# Altium PCB STM32F103ZET6-double.PcbDoc
Units mm, origin at the board's own origin, x right, y up, seen from the top; angles counter-clockwise.
Board outline 36 x 36 mm, 2 copper layers (Top Layer, Bottom Layer), stack 1.571 mm thick; 12 components, 102 nets, 262 pads, 90 vias.
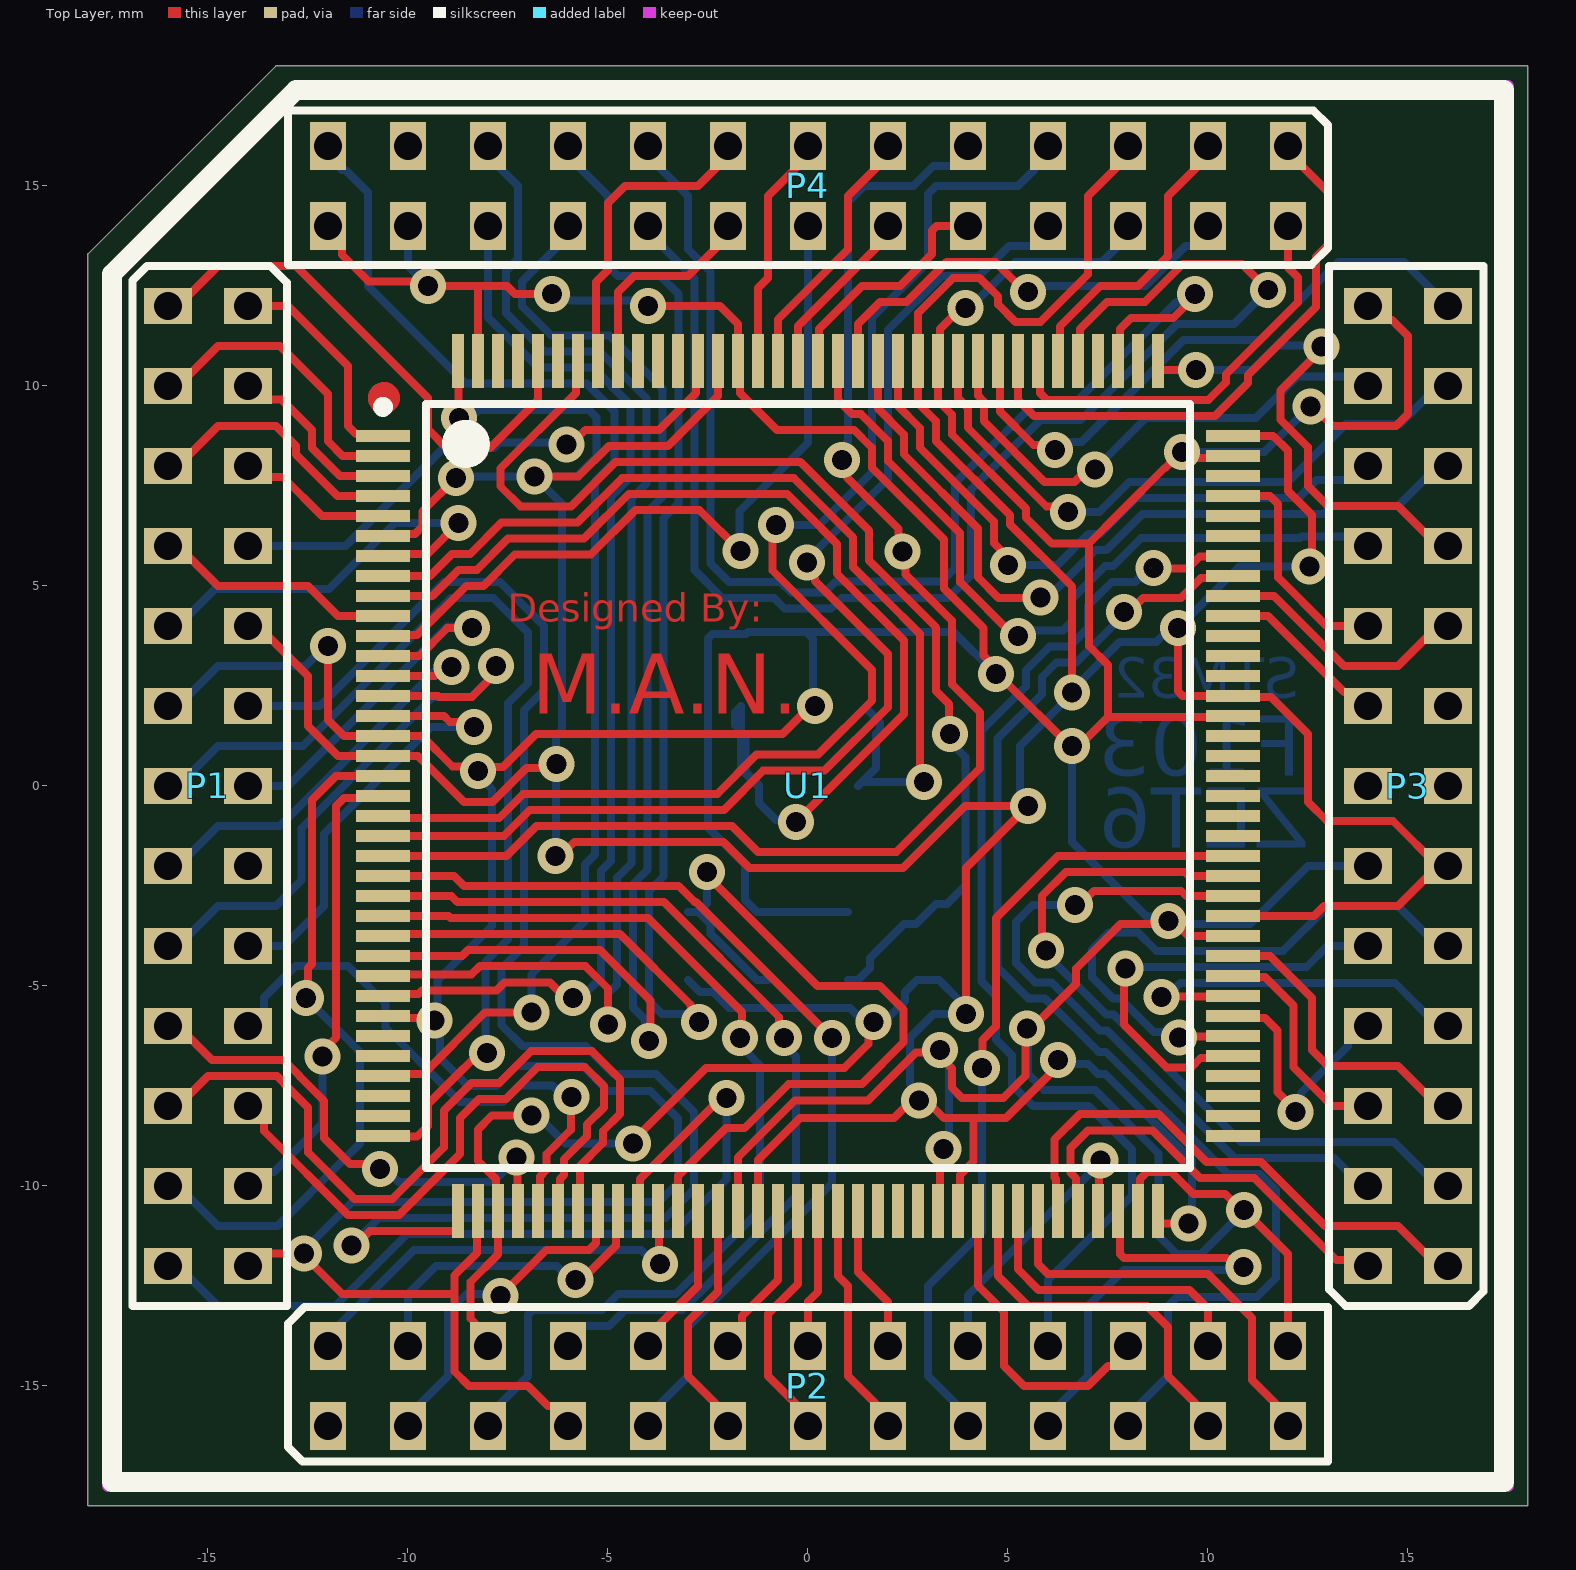
[diagram p0: Top Layer view]
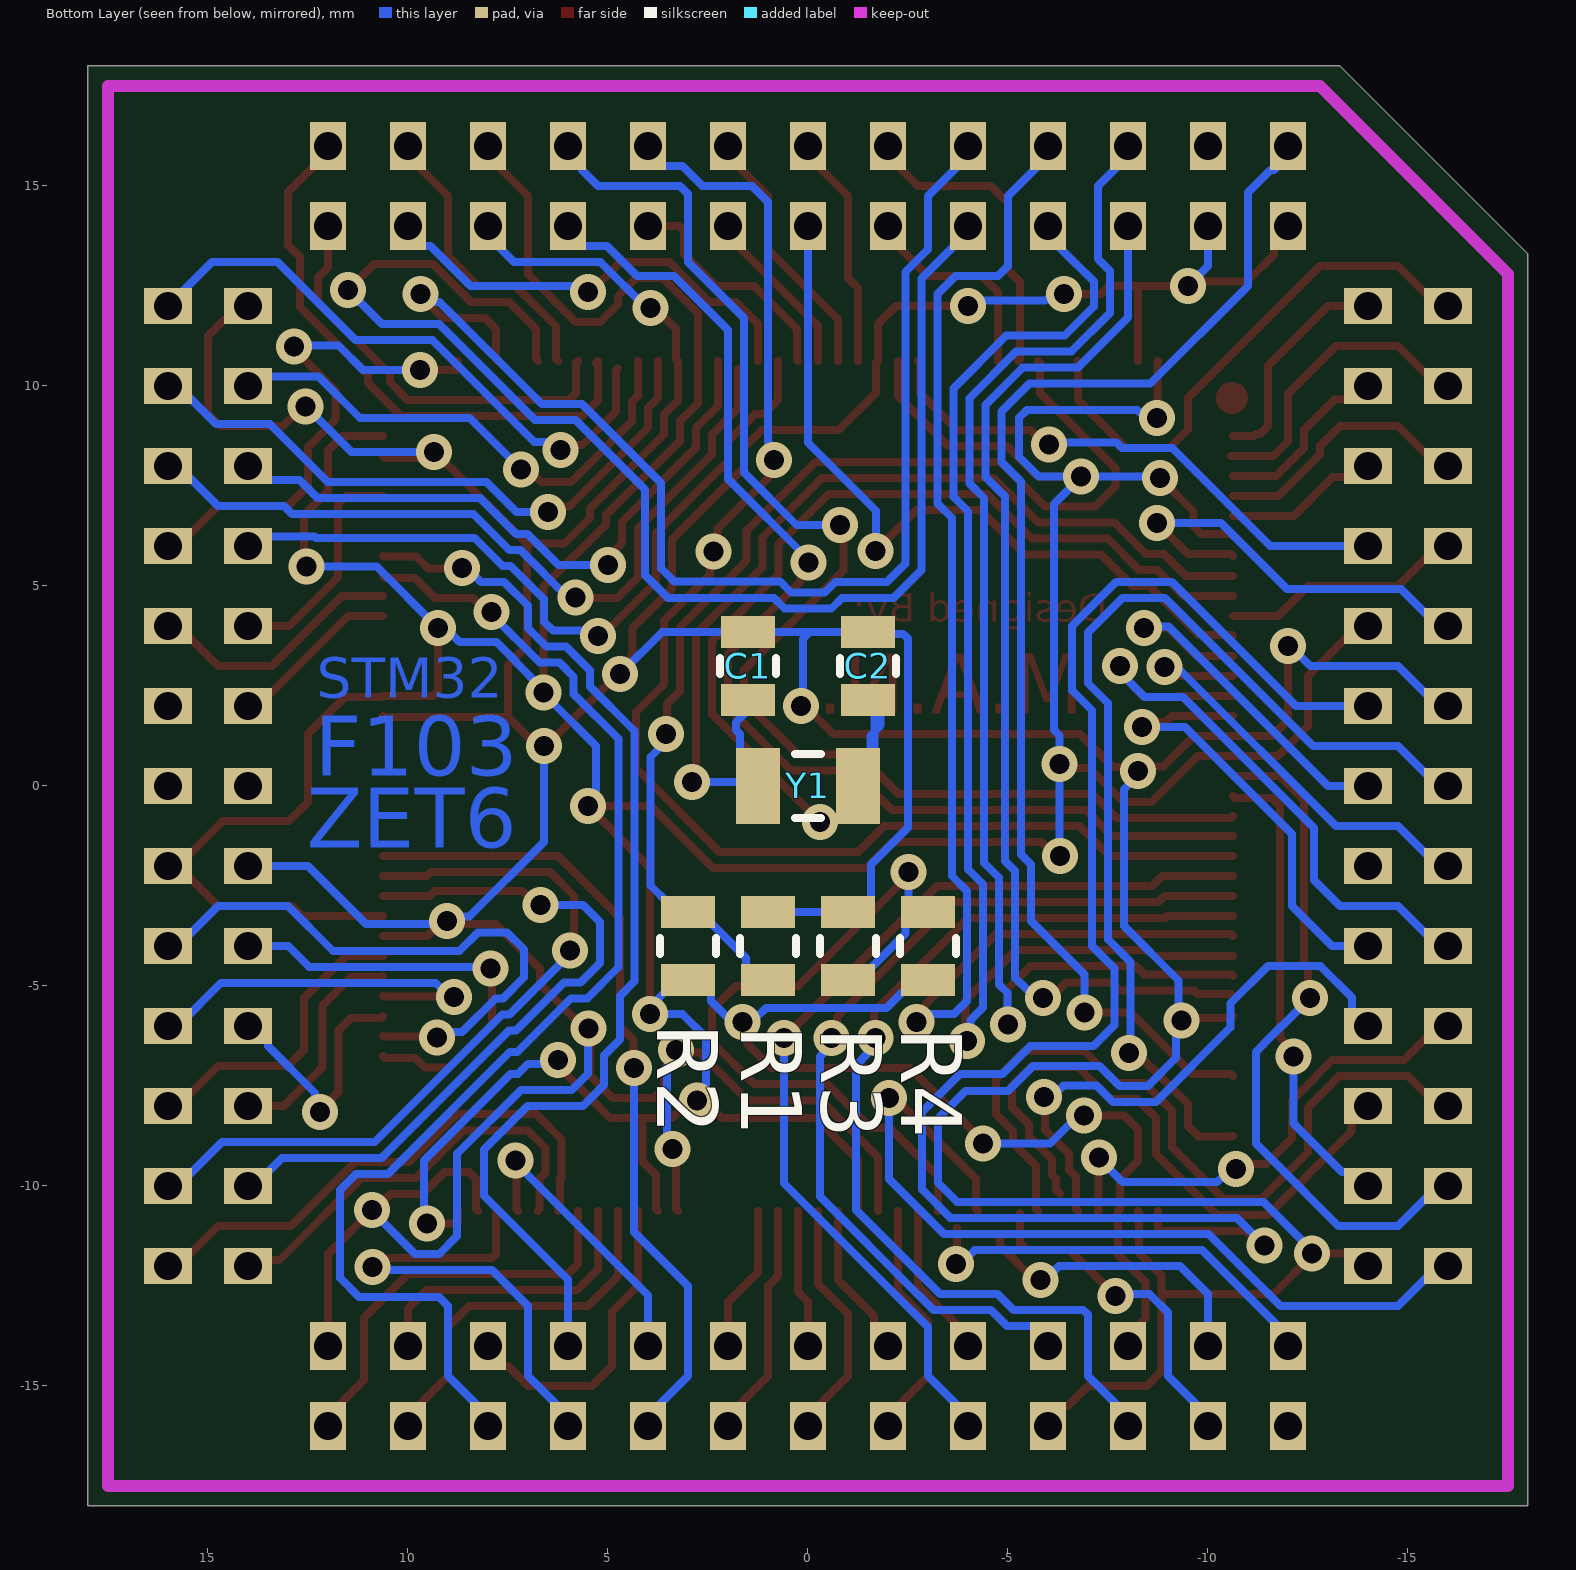
[diagram p1: Bottom Layer view, seen from below]
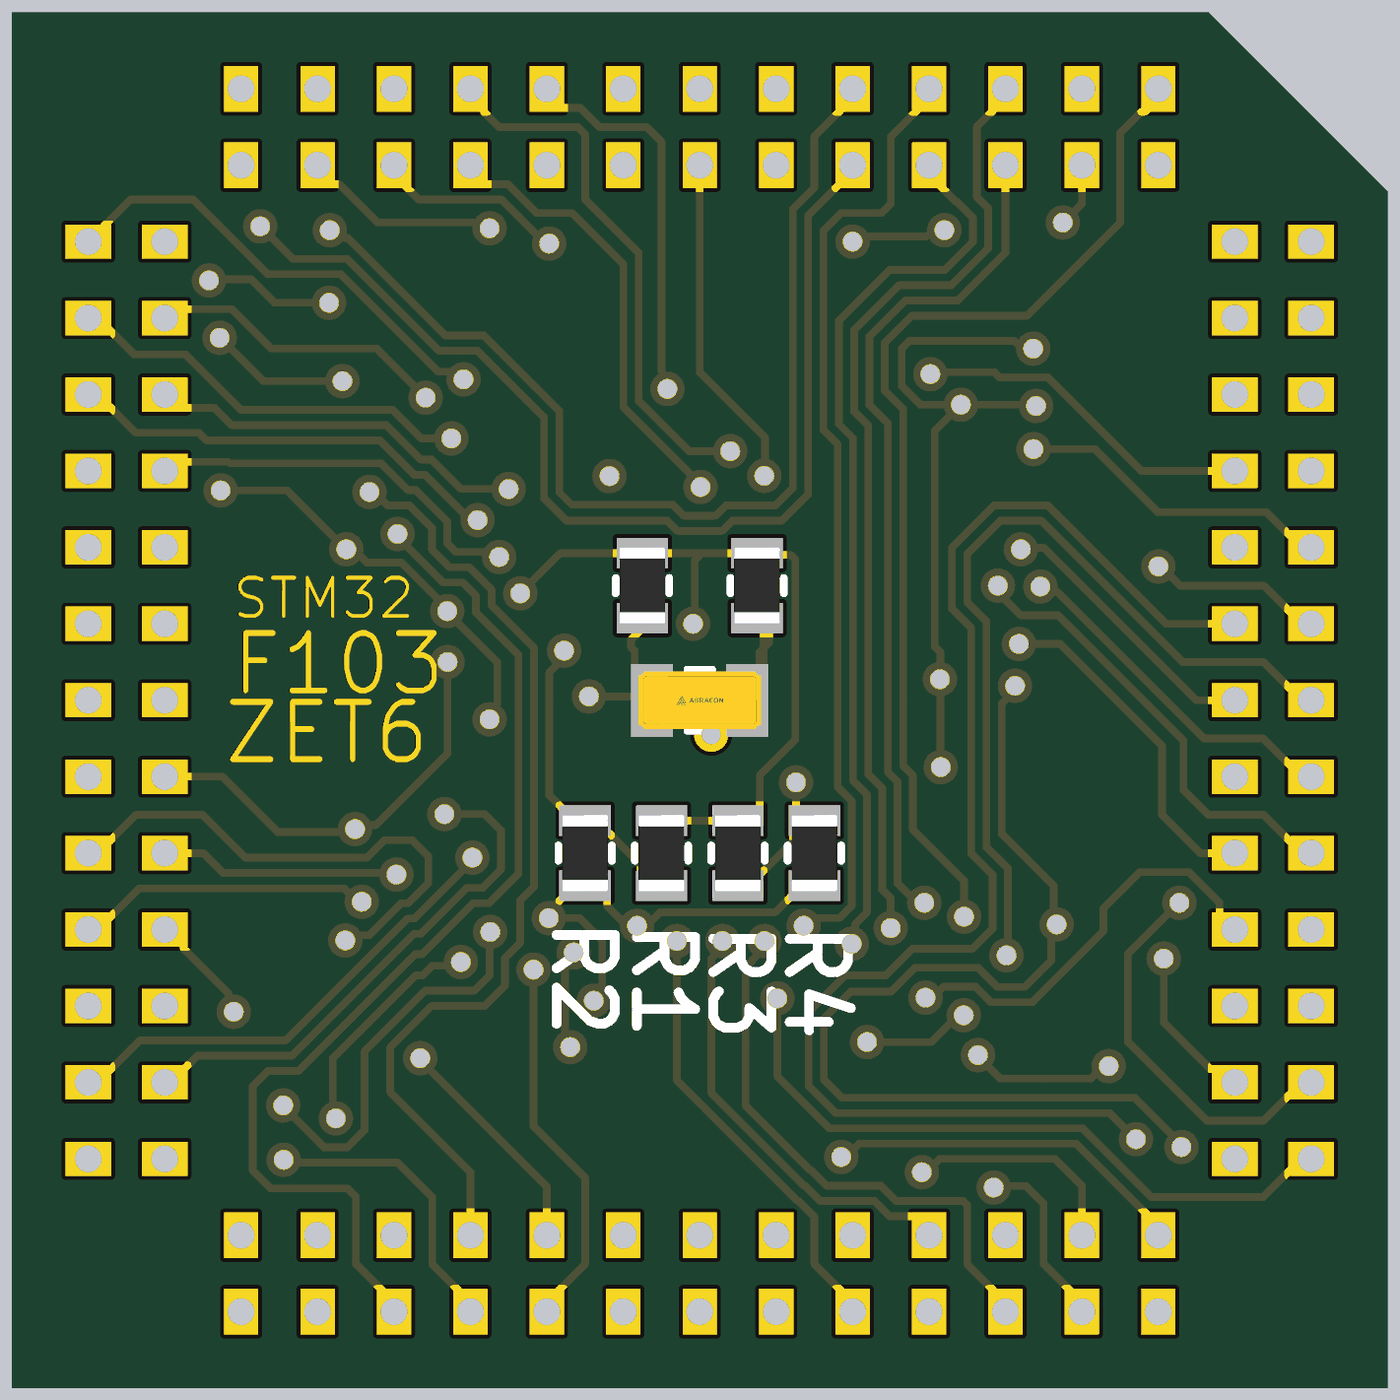
[diagram p2: 3D render of the assembled board from below, using the file's embedded part models]

## Layer stack, top to bottom
Top Solder: solder mask 0.0102, Solder Resist, Dk 3.5
Top Layer: signal copper 0.0356
Dielectric2: dielectric 1.5, FR-4, Dk 4.8
Bottom Layer: signal copper 0.0356
Bottom Solder: solder mask 0.0102, Solder Resist, Dk 3.5

## Board outline
-18,-18 18,-18 18,18 -13.3,18 -18,13.3

## Design rules (kind name [scope] priority, off if disabled: settings)
Clearance Clearance_1 [InNamedPolygon('Top Layer-No Net')] p1: gap=0.5 ignorepadtopadclearanceinfootprint=FALSE except(0: Arc-Hole Track-Hole SMDPad-Hole THPad-Hole Via-Hole Fill-Hole Poly-Hole Region-Hole Text-Hole)
Clearance [All] p2: gap=0.2 ignorepadtopadclearanceinfootprint=FALSE
ComponentClearance [All] p1 off: gap=0.254 collisioncheckmode=3 verticalgap=0.254 showdistances=FALSE
FabricationTestPointUsage TestPointUsage [All] p1: valid=0 allowmultiple=FALSE
FabricationTestpoint Testpoint [All] p1: side=3 testpointundercomponent=TRUE minsize=1.016 maxsize=2.54 preferedsize=1.524 minholesize=0 maxholesize=1.016 preferedholesize=0.813 testpointgrid=0.025 allowsidetop=TRUE allowsidebottom=TRUE usegrid=TRUE gridtolerance=0
Height [All] p1 off: minheight=0 maxheight=25.4 prefheight=12.7
HoleSize [All] p1 off: absolutevalues=TRUE maxlimit=2.54 minlimit=0.025 maxpercent=80.000 minpercent=20.000
HoleToHoleClearance [All] p1 off: gap=0.254 allowstackedmicrovias=TRUE
LayerPairs [All] p1 off: enforce=TRUE
MinimumSolderMaskSliver [All] p1 off: minsoldermaskwidth=0.254
NetAntennae [All] p1 off: netantennaetolerance=0
PolygonConnect PolygonConnect_1 [All vs IsNamedPolygon('Top Layer-No Net') Or IsNamedPolygon('Top Layer-No Net')] p1: thpad.connectstyle=Direct thpad.reliefconductorwidth=0.254 thpad.reliefentries=4 thpad.polygonreliefangle="90 Angle" thpad.airgapwidth=0.254 smdpad.connectstyle=Direct smdpad.reliefconductorwidth=0.254 smdpad.reliefentries=4 smdpad.polygonreliefangle="90 Angle" smdpad.airgapwidth=0.254 via.connectstyle=Relief via.reliefconductorwidth=0.254 via.reliefentries=4 via.polygonreliefangle="90 Angle" via.airgapwidth=0.254
PolygonConnect [All] p2: connectstyle=Relief reliefconductorwidth=0.254 reliefentries=4 polygonreliefangle="90 Angle" airgapwidth=0.254
RoutingVias [All] p1: holewidth=0.5 width=0.9 viastyle="Through Hole" minholewidth=0.5 minwidth=0.9 maxholewidth=0.5 maxwidth=0.9
SilkToSilkClearance [All] p1 off: silktosilkclearance=0.254
SilkToSolderMaskClearance [IsPad] p1 off: minsilkscreentomaskgap=0.254 clearancetoexposedcopper=TRUE
SolderMaskExpansion [All] p1: expansion=0.102 istentingtop=FALSE
Width [All] p1: maxlimit=1 minlimit=0.2 preferedwidth=0.2
19 further rules are at their usual default settings.

## Classes and differential pairs
component class STM32F103ZET6-double: C1 P1 P2 P3 P4 R1 R2 R3 R4 U1 Y1

## Components (designator, comment, footprint, x,y, rotation, side; value= is the part's Value field where it differs from the comment)
C1 "12.5pF" SMD_R0805 1.5,3 r270 bottom
C2 "12.5pF" SMD_R0805 -1.5,3 r270 bottom
P1 "MHDR2X13" HED-2mm-13X2 -16,12 r0 top
P2 "MHDR2X13" HED-2mm-13X2 -12,-16 r90 top locked
P3 "MHDR2X13" HED-2mm-13X2 16,-12 r180 top locked
P4 "MHDR2X13" HED-2mm-13X2 12,16 r270 top
R1 "10K" SMD_R0805 1,-4 r270 bottom
R2 "10K" SMD_R0805 3,-4 r270 bottom
R3 "10K" SMD_R0805 -1,-4 r270 bottom
R4 "10K" SMD_R0805 -3,-4 r270 bottom
U1 "STM32F103ZET6" STM-LQFP144_V 0,0 r0 top locked
Y1 "ABS07-32.768KHZ-T" FP-ABS07-MFG 0,0 r180 bottom

## Footprints (in the part's own frame and the unit in brackets; to place one, negate y for a bottom-side part, rotate by r counter-clockwise, add the part's x,y. Pads: shape width x height; smd on the part's side, far side on the other; paste and mask are expansions set on the pad)
FP-ABS07-MFG [mm]
  rect 1.1x1.9 smd paste+0 mask+0: 1(-1.25,0) 2(1.25,0)
  silkscreen extent -0.32,-0.8 0.33,0.8, body extent -1.6,-0.75 1.6,0.75, height 0.9
HED-2mm-13X2 [mm]
  rect 1.2x0.9 hole 0.7: 1(0,0) 2(2,0) 3(0,-2) 4(2,-2) 5(0,-4) 6(2,-4) 7(0,-6) 8(2,-6) 9(0,-8) 10(2,-8) 11(0,-10) 12(2,-10) 13(0,-12) 14(2,-12) 15(0,-14) 16(2,-14) 17(0,-16) 18(2,-16) 19(0,-18) 20(2,-18) 21(0,-20) 22(2,-20) 23(0,-22) 24(2,-22) 25(0,-24) 26(2,-24)
  silkscreen extent -0.89,-25 2.97,1
SMD_R0805 [mm] "Chip Resistor, 2-Leads, Body 2.0x1.3mm, IPC Medium Density"
  rect 0.8x1.35 smd: 1(-0.85,0) 2(0.85,0)
  silkscreen extent -0.2,-0.7 0.2,0.7, body extent -1,-0.6 1,0.6, height 0.45
STM-LQFP144_V [mm] "Thin QFP, 144-Leads, Body 20x20mm, Pitch 0.5mm, ST Recommended"
  rect 1.35x0.3 smd: 1(-10.625,8.75) 2(-10.625,8.25) 3(-10.625,7.75) 4(-10.625,7.25) 5(-10.625,6.75) 6(-10.625,6.25) 7(-10.625,5.75) 8(-10.625,5.25) 9(-10.625,4.75) 10(-10.625,4.25) 11(-10.625,3.75) 12(-10.625,3.25) 13(-10.625,2.75) 14(-10.625,2.25) 15(-10.625,1.75) 16(-10.625,1.25) 17(-10.625,0.75) 18(-10.625,0.25) 19(-10.625,-0.25) 20(-10.625,-0.75) 21(-10.625,-1.25) 22(-10.625,-1.75) 23(-10.625,-2.25) 24(-10.625,-2.75) 25(-10.625,-3.25) 26(-10.625,-3.75) 27(-10.625,-4.25) 28(-10.625,-4.75) 29(-10.625,-5.25) 30(-10.625,-5.75) 31(-10.625,-6.25) 32(-10.625,-6.75) 33(-10.625,-7.25) 34(-10.625,-7.75) 35(-10.625,-8.25) 36(-10.625,-8.75) 73(10.625,-8.75) 74(10.625,-8.25) 75(10.625,-7.75) 76(10.625,-7.25) 77(10.625,-6.75) 78(10.625,-6.25) 79(10.625,-5.75) 80(10.625,-5.25) 81(10.625,-4.75) 82(10.625,-4.25) 83(10.625,-3.75) 84(10.625,-3.25) 85(10.625,-2.75) 86(10.625,-2.25) 87(10.625,-1.75) 88(10.625,-1.25) 89(10.625,-0.75) 90(10.625,-0.25) 91(10.625,0.25) 92(10.625,0.75) 93(10.625,1.25) 94(10.625,1.75) 95(10.625,2.25) 96(10.625,2.75) 97(10.625,3.25) 98(10.625,3.75) 99(10.625,4.25) 100(10.625,4.75) 101(10.625,5.25) 102(10.625,5.75) 103(10.625,6.25) 104(10.625,6.75) 105(10.625,7.25) 106(10.625,7.75) 107(10.625,8.25) 108(10.625,8.75)
  rect 0.3x1.35 smd: 37(-8.75,-10.625) 38(-8.25,-10.625) 39(-7.75,-10.625) 40(-7.25,-10.625) 41(-6.75,-10.625) 42(-6.25,-10.625) 43(-5.75,-10.625) 44(-5.25,-10.625) 45(-4.75,-10.625) 46(-4.25,-10.625) 47(-3.75,-10.625) 48(-3.25,-10.625) 49(-2.75,-10.625) 50(-2.25,-10.625) 51(-1.75,-10.625) 52(-1.25,-10.625) 53(-0.75,-10.625) 54(-0.25,-10.625) 55(0.25,-10.625) 56(0.75,-10.625) 57(1.25,-10.625) 58(1.75,-10.625) 59(2.25,-10.625) 60(2.75,-10.625) 61(3.25,-10.625) 62(3.75,-10.625) 63(4.25,-10.625) 64(4.75,-10.625) 65(5.25,-10.625) 66(5.75,-10.625) 67(6.25,-10.625) 68(6.75,-10.625) 69(7.25,-10.625) 70(7.75,-10.625) 71(8.25,-10.625) 72(8.75,-10.625) 109(8.75,10.625) 110(8.25,10.625) 111(7.75,10.625) 112(7.25,10.625) 113(6.75,10.625) 114(6.25,10.625) 115(5.75,10.625) 116(5.25,10.625) 117(4.75,10.625) 118(4.25,10.625) 119(3.75,10.625) 120(3.25,10.625) 121(2.75,10.625) 122(2.25,10.625) 123(1.75,10.625) 124(1.25,10.625) 125(0.75,10.625) 126(0.25,10.625) 127(-0.25,10.625) 128(-0.75,10.625) 129(-1.25,10.625) 130(-1.75,10.625) 131(-2.25,10.625) 132(-2.75,10.625) 133(-3.25,10.625) 134(-3.75,10.625) 135(-4.25,10.625) 136(-4.75,10.625) 137(-5.25,10.625) 138(-5.75,10.625) 139(-6.25,10.625) 140(-6.75,10.625) 141(-7.25,10.625) 142(-7.75,10.625) 143(-8.25,10.625) 144(-8.75,10.625)
  silkscreen extent -10.75,-9.55 9.55,9.6, body extent -10,-10 10,10, height 1.6

## Part data
C1 C2: library part Cap, "Capacitor", LatestRevisionDate=17-Jul-2002, LatestRevisionNote="Re-released for DXP Platform.", PackageReference=RAD-0.3, Published=8-Jun-2000, Publisher="Altium Limited"
P1 P2 P3 P4: "Header, 13-Pin, Dual row", LatestRevisionDate=17-Jul-2002, LatestRevisionNote="Re-released for DXP Platform.", Publisher="Altium Limited"
R1 R2 R3 R4: library part Res1, "Resistor", LatestRevisionDate=17-Jul-2002, LatestRevisionNote="Re-released for DXP Platform.", PackageReference=AXIAL-0.3, Published=8-Jun-2000, Publisher="Altium Limited"
U1: library part CMP-0237-00176-3, "ARM Cortex-M3 32-bit MCU, 512 KB Flash, 64 KB Internal RAM, 112 I/Os, 144-pin LQFP, -40 to 85 degC, Tray", I/Os (High Current)=112, Operating Frequency(F) (Processor speed) (MHz)=72, Supply Voltage(Vcc) min (V)=2, A/D Converter="3x12-bit (21 Channel)", ComponentLink1Description="Manufacturer URL", ComponentLink1URL=http://www.st.com/web/en/home.html, ComponentLink2Description=Datasheet, ComponentLink2URL=http://www.st.com/st-web-ui/static/active/en/resource/technical/document/datasheet/CD00191185.pdf, ComponentLink3Description="Package Specification", ComponentLink3URL=http://www.st.com/st-web-ui/static/active/en/resource/technical/document/datasheet/DM00037051.pdf, Core="ARM Cortex-M3", D/A Converter="2x12-bit (2 Channel)", DatasheetVersion="Rev. 8", FLASH Size (Prog) (kB)=512, Internal RAM Size (kB)=64, Mounting Technology="Surface Mount", PackageDescription="144-Pin Low Profile Quad Flat Package, 20 x 20 mm Body, 0.5 mm Pitch", PackageReference=LQFP144, PackageVersion="Rev. 4, 06/2013", Packing=Tray, PartNumber=STM32F103ZET6
Y1: library part CMP-0447-00001-4, "Crystal 32.768kHz ±20ppm (Tol) 12.5pF FUND 70kΩ 2-Pin CSMD T/R", Case/Package=CSMD, ESR (Equivalent Series Resistance)=70kR, Frequency=32.768kHz, Frequency Tolerance=20ppm, Load Capacitance=12.5pF, Max Operating Temperature=85°C, Min Operating Temperature=-40°C, Operating Frequency="32.768 kHz", Package Quantity=3000, Depth=1.5mm, Height=0.9mm, Lead Free="Lead Free", Length=3.2mm, Number of Pins=2, Packaging="Tape and Reel", Radiation Hardening=No, REACH SVHC="No SVHC", RoHS Compliant=Yes, Series=ABS07, Series Resistance=70kR, Termination=SMD/SMT, Tolerance=20ppm, Width=1.5mm

## Via types
v1: diameter 0.9, hole 0.5, Top Layer to Bottom Layer, tented both sides, 89 vias
v2: diameter 0.9, hole 0.5, Top Layer to Bottom Layer, 1 vias

## Nets (pads, with @x,y where several pads share a name; then routed paths per layer and width w, separated by ;. In a path a pad name is that pad's centre, name@x,y a point inside that pad or via, vN(x,y) a via of type N, cw(c..) or ccw(c..) an arc to the next point about the centre after c; other vN are vias at no path point)
7SEG-CLK: P4.18 U1.113 | length 34.8
  Top Layer w0.2: U1.113 6.8,10.675 6.8,11.424 7.476,12.1 8.421,12.1 9.371,13.05 10.85,13.05 v1(11.5,12.4)
  Bottom Layer w0.2: P4.18 -4,13.85 -2.838,12.688 -2.838,5.396 -2.142,4.7 -0.851,4.7 -0.581,4.43 0.581,4.43 0.851,4.7 3.5,4.7 4.075,5.275 4.075,7.409 5.812,9.146 6.82,9.146 9.224,11.55 10.65,11.55 v1(11.5,12.4)
7SEG-LCH: P1.4 U1.3 | length 4.6
  Top Layer w0.2: P1.4 -13.663,9.663 -13.163,9.663 -12.4,8.9 -12.4,8.451 -11.699,7.75 U1.3
7SEG-RST: P4.17 U1.111 | length 30.9
  Top Layer w0.2: U1.111 7.8,10.675 7.8,11.424 8.076,11.7 9.131,11.7 9.681,12.25 v1(9.681,12.3)
  Bottom Layer w0.2: P4.17 -4,15.75 -3,14.75 -3,13.416 -2.438,12.854 -2.438,5.562 -1.976,5.1 -0.685,5.1 -0.415,4.83 0.415,4.83 0.7,5.115 3.349,5.115 3.675,5.441 3.675,7.575 5.646,9.546 6.654,9.546 9.058,11.95 9.066,11.95 9.216,12.1 9.292,12.1 9.492,12.3 v1(9.681,12.3)
7SEG-SDI: P1.3 U1.2 | length 7.7
  Top Layer w0.2: P1.3 -15.75,10 -14.75,11 -13.2,11 -12,9.8 -12,8.617 -11.633,8.25 U1.2 U1.2@-10.575,8.25
7SEG-SHF: P1.2 U1.1 | length 5.6
  Top Layer w0.2: P1.2 -13,12 -11.5,10.5 -11.5,9 -11.3,8.8 -11.2,8.8 -11.15,8.75 U1.1
ADC_LEVEL: P4.7 U1.20 | length 33
  Top Layer w0.2: U1.20 -10.575,-0.8 -7.718,-0.8 -7.118,-0.2 -2.266,-0.2 -1.283,0.783 0.251,0.783 1.6,2.131 1.6,2.9 -0.891,5.391 -0.891,6.424 v1(-0.797,6.518)
  Bottom Layer w0.2: v1(-0.797,6.518) 0.278,6.518 1.596,7.835 1.596,11.696 3,13.1 3,14.8 3.2,15 5.25,15 5.65,15.4 5.65,15.65 P4.7
ADC_MIC: P4.9 U1.22 | length 35.7
  Top Layer w0.2: U1.22 -7.537,-1.75 -6.787,-1 -1.9,-1 -1.25,-1.65 2.211,-1.65 4.3,0.439 4.3,1.839 3.6,2.539 3.6,4.132 2.444,5.287 2.444,5.782 2.264,5.963 2.264,6.428 0.98,7.712 0.98,8.012 v1(0.846,8.146)
  Bottom Layer w0.2: v1(0.846,8.146) 0.98,8.28 0.98,8.593 1,8.613 1,14.6 1.4,15 2.634,15 3.134,15.5 3.65,15.5 4,15.85 P4.9
  other v1: 2.362,5.865
BOOT0: R1.2 R2.1 U1.138 | length 28.5
  Top Layer w0.2: U1.138 -5.8,10.575 -5.8,9.826 -7.69,7.936 -7.69,7.492 -7.181,6.983 -5.926,6.983 -4.809,8.1 -0.188,8.1 1.53,6.382 1.53,5.636 2.051,5.115 3.2,3.966 3.2,2.374 3.526,2.048 3.526,1.321 v1(3.549,1.298)
  Bottom Layer w0.2: R1.2 1.25,-4.85 1.55,-4.55 1.55,-4.3 2.4,-3.45 2.7,-3.45 3.2,-2.95 3.475,-2.95 3.94,-2.485 3.94,0.717 3.549,1.108 v1(3.549,1.298)
BOOT1: R3.2 R4.1 U1.48 | length 19
  Top Layer w0.2: U1.48 -3.25,-9.75 -2.05,-8.55 -1.581,-8.55 -0.481,-7.45 1.35,-7.45 2.393,-6.407 2.393,-5.593 1.8,-5 0.241,-5 -2.52,-2.239 v1(-2.52,-2.15)
  Bottom Layer w0.2: R4.1 R4.1@-2.725,-3.15 ; R4.1@-2.738,-3.15 -2.438,-3.45 -2.438,-3.687 -1.275,-4.85 R3.2 ; R4.1@-2.713,-3.138 -2.52,-2.945 v1(-2.52,-2.15)
CLCD-EN: P3.20 U1.125 | length 19.1
  Top Layer w0.2: U1.125 0.75,9.65 1.104,9.296 1.322,9.296 1.996,8.622 1.996,8.127 3.8,6.323 3.8,5.102 5.154,3.748 v1(5.248,3.748)
  Bottom Layer w0.2: v1(5.248,3.748) 5.382,3.882 6.375,3.882 6.604,4.112 6.604,4.672 7.431,5.5 7.631,5.5 8.331,6.2 12.297,6.2 12.337,6.24 13.76,6.24 P3.20
DATA0: P4.3 U1.114 | length 7.5
  Top Layer w0.2: U1.114 6.3,10.675 6.3,11.49 7.31,12.5 8.255,12.5 9,13.245 9,14.75 10,15.75 P4.3
DATA1: P4.2 U1.115 | length 10.5
  Top Layer w0.2: U1.115 5.8,10.575 5.8,9.826 5.976,9.65 9.811,9.65 10.011,9.65 10.45,10.089 10.45,10.289 12.25,12.089 12.25,12.711 12,12.961 P4.2
DATA2: P4.1 U1.116 | length 14.5
  Top Layer w0.2: U1.116@5.3,10.575 U1.116 5.25,9.65 5.65,9.25 10,9.25 10.176,9.25 11,10.074 11,10.274 12.7,11.974 12.7,13.226 13,13.526 13,14.85 12,15.85 P4.1
DATA3: P3.25 U1.117 | length 15.1
  Top Layer w0.2: U1.117@4.755,10.43 4.8,10.385 4.8,9.363 5.644,8.519 6.059,8.519 v1(6.182,8.396)
  Bottom Layer w0.2: v1(6.182,8.396) 6.372,8.396 6.576,8.6 6.839,8.6 9.389,11.15 11.311,11.15 13.261,13.1 14.9,13.1 P3.25
DATA4: P3.24 U1.118 | length 13
  Top Layer w0.2: U1.118 4.25,9.762 4.396,9.616 4.396,9.121 5.917,7.6 6.666,7.6 6.983,7.917 v1(7.172,7.917)
  Bottom Layer w0.2: v1(7.172,7.917) 8.46,9.204 11.204,9.204 12.234,10.234 13.766,10.234 P3.24
DATA5: P3.23 U1.119 | length 16
  Top Layer w0.2: U1.119 3.75,9.697 3.996,9.451 3.996,8.956 5.971,6.981 6.369,6.981 v1(6.5,6.85)
  Bottom Layer w0.2: v1(6.5,6.85) 7.284,6.85 8.034,7.6 12.004,7.6 13.454,9.05 14.8,9.05 15.75,10 P3.23
DATA6: P3.22 U1.122 | length 16.3
  Top Layer w0.2: U1.122 2.25,9.5 2.796,8.954 2.796,8.459 4.65,6.605 4.65,6.068 5.002,5.716 v1(5.002,5.527)
  Bottom Layer w0.2: v1(5.002,5.527) 6.237,5.527 7.01,6.3 7.3,6.3 8.2,7.2 12.262,7.2 12.712,7.65 13.65,7.65 P3.22
DATA7: P3.21 U1.123 | length 19.6
  Top Layer w0.2: U1.123@1.75,10.425 1.75,9.434 2.396,8.788 2.396,8.293 4.25,6.439 4.25,5.218 4.768,4.7 5.8,4.7 v1(5.813,4.713)
  Bottom Layer w0.2: v1(5.813,4.713) 6.002,4.713 7.189,5.9 7.465,5.9 8.366,6.8 12.9,6.8 13.1,7 14.75,7 P3.21@15.75,8 ; P3.21@15.77,8 P3.21
DATA8: P2.10 U1.49 | length 3.9
  Top Layer w0.2: P2.10 -4,-13.75 -2.75,-12.5 U1.49
DATA9: P2.11 U1.50 | length 6.1
  Top Layer w0.2: U1.50 -2.25,-12.643 -3,-13.393 -3,-14.75 -2,-15.75 P2.11
DATA10: P2.12 U1.53 | length 3.9
  Top Layer w0.2: P2.12 -1.65,-13.65 -1.65,-13.25 -0.75,-12.35 U1.53
DATA11: P2.13 U1.54 | length 6.1
  Top Layer w0.2: U1.54 -0.25,-12.45 -1,-13.2 -1,-14.75 0,-15.75 P2.13
DATA12: P2.14 U1.55 | length 3.5
  Top Layer w0.2: P2.14 0,-12.894 0.25,-12.644 U1.55
DATA13: P2.15 U1.56 | length 5.9
  Top Layer w0.2: U1.56 0.75,-12.25 1,-12.5 1,-14.75 2,-15.75 P2.15
DATA14: P2.16 U1.57 | length 3.7
  Top Layer w0.2: U1.57 1.25,-12.15 2,-12.9 P2.16
DATA15: P2.17 U1.87 | length 20.4
  Top Layer w0.2: v1(4.35,-7.05) 4.362,-7.038 4.362,-6.349 4.7,-6.011 4.7,-3.3 6.25,-1.75 U1.87
  Bottom Layer w0.2: P2.17 4,-15.75 3,-14.75 3,-12.5 4.35,-11.15 v1(4.35,-7.05)
DCM-EN-PWM: P2.1
DCM-IN1: P2.3 U1.44 | length 8.5
  Top Layer w0.2: v1(-7.691,-12.75) -6.541,-11.6 -5.476,-11.6 -5.3,-11.424 U1.44@-5.3,-10.675
  Bottom Layer w0.2: P2.3 -10,-15.75 -9,-14.75 -9,-13.166 -8.541,-12.707 -7.734,-12.707 v1(-7.691,-12.75)
DCM-IN2: P2.4 U1.45 | length 7.6
  Top Layer w0.2: v1(-5.811,-12.35) -5.66,-12.35 -4.8,-11.49 -4.8,-11.2 U1.45@-4.751,-11.2
  Bottom Layer w0.2: P2.4 -10,-12.7 -9.3,-12 -6.278,-12 -5.928,-12.35 v1(-5.811,-12.35)
DCM-PWM: U1.35
DM-CLK: P2.22 U1.63 | length 8
  Top Layer w0.2: U1.63 4.25,-12.495 4.9,-13.145 4.9,-14.5 5.4,-15 7,-15 7.5,-14.5 7.65,-14.5 8,-14.15 P2.22
DM-RST: P2.23 U1.64 | length 9.3
  Top Layer w0.2: U1.64 4.75,-12.25 5.5,-13 8.474,-13 9,-13.526 9,-14.75 10,-15.75 P2.23
ETH-CS: P4.14 U1.11 | length 19.5
  Top Layer w0.2: U1.11 -10.605,3.77 -9.77,3.77 -8.54,5 -8.113,5 -7.329,5.783 -5.429,5.783 -4.312,6.9 -2.716,6.9 v1(-1.688,5.872)
  Bottom Layer w0.2: v1(-1.688,5.872) -1.706,5.891 -1.706,6.875 0,8.581 P4.14
ETH-RST: P1.9 U1.7 | length 10.6
  Top Layer w0.2: U1.7 -10.575,5.8 -9.505,5.8 v1(-8.733,6.572)
  Bottom Layer w0.2: P1.9 -15.75,4 -14.825,4.925 -11.975,4.925 -10.328,6.572 v1(-8.733,6.572)
GLCD-CSA: P4.4 U1.124 | length 11.4
  Top Layer w0.2: U1.124 1.25,11.55 1.8,12.1 2.466,12.1 3.466,13.1 4.684,13.1 5.434,12.35 v1(5.5,12.35)
  Bottom Layer w0.2: v1(5.5,12.35) 5.634,12.484 5.889,12.484 5.905,12.5 8.437,12.5 9.437,13.5 9.65,13.5 10,13.85 P4.4
GLCD-CSB: P1.18 U1.15 | length 11.4
  Top Layer w0.2: U1.15 -9.1,1.75 -8.954,1.604 -8.48,1.604 v1(-8.35,1.474)
  Bottom Layer w0.2: P1.18 -13.1,-4 -12.1,-3 -12.1,-1.2 -9.426,1.474 v1(-8.35,1.474)
GLCD-EN: P3.17 U1.100 | length 6.5
  Top Layer w0.2: U1.100 11.651,4.75 13.401,3 14.75,3 15.75,4 P3.17
GLCD-RST: P3.16 U1.99 | length 4.3
  Top Layer w0.2: U1.99 11.5,4.25 13.4,2.35 13.65,2.35 P3.16
GND: C1.1 C2.1 P1.11 P1.26 P2.7 P2.26 P3.12 P3.26 P4.6 P4.24 P4.26 R1.1 R3.1 U1.16 U1.30 U1.38 U1.51 U1.61 U1.71 U1.83 U1.94 U1.107 U1.120 U1.130 U1.143 | length 198.5
  Top Layer w0.2: P1.26 -13.69,-11.69 v1(-12.604,-11.69) ; v1@-12.603,-11.7 -12.603,-11.737 -11.634,-12.707 -8.841,-12.707 ; v1(-12,3.5) -12,1.65 -11.6,1.25 U1.16 -9.65,1.25 -8.892,0.492 -8.363,0.492 v1(-8.25,0.378) ; P4.26 -11.65,13.65 -11.65,13.28 -10.985,12.615 -9.615,12.615 v1(-9.5,12.5) -8.25,12.5 ; U1.30 -10.575,-5.8 -9.404,-5.8 v1(-9.338,-5.866) ; U1.38 -8.275,-10.65 -8.275,-11.675 -8.841,-12.241 -8.841,-12.707 ; U1.143 -8.25,12.5 ; v1@-8.191,0.382 -8.098,0.476 -7.624,0.476 -6.8,1.3 -0.635,1.3 0.065,2 v1(0.175,2) ; v1(-6.4,12.3) -7.32,12.3 -7.52,12.5 -8.25,12.5 ; P2.7 -6,-15.85 -6.35,-15.5 -6.5,-15.5 -7,-15 -8.474,-15 -8.841,-14.633 -8.841,-12.707 ; v1(-4,12) -2.2,12 -1.75,11.55 U1.130 -1.7,10.575 -1.7,9.826 -0.77,8.896 1.157,8.896 1.596,8.457 1.596,7.962 3.4,6.158 3.4,4.936 4.388,3.949 4.388,3.264 4.697,2.955 v1(4.697,2.797) ; U1.51 -1.75,-9.284 -0.329,-7.863 1.502,-7.863 2.703,-6.663 3.237,-6.663 v1(3.3,-6.6) 3.3,-6.767 3.6,-7.067 3.6,-7.545 3.855,-7.8 4.885,-7.8 5.445,-7.24 5.445,-6.1 v1(5.483,-6.062) ; U1.61 3.3,-10.575 3.3,-9.165 v1(3.389,-9.075) ; v1(3.941,11.949) 3.824,11.949 3.3,11.424 3.3,10.675 U1.120 3.25,9.631 3.596,9.285 3.596,8.79 5.45,6.936 5.45,6.705 6.1,6.055 7.023,6.055 ; v1@4.947,2.6 6.5,1.047 v1@6.5,1 ; v1@5.553,-6.1 6.7,-4.953 6.7,-4.569 7.469,-3.8 7.813,-3.456 v1@8.936,-3.456 ; v1@6.775,1 7.5,1.725 ; U1.71 8.3,-10.575 8.3,-9.826 8.476,-9.65 9.084,-9.65 9.634,-10.2 10.433,-10.2 10.699,-10.466 10.766,-10.466 12,-11.7 P2.26 ; v1@9.021,-3.5 9.26,-3.5 9.51,-3.75 U1.83 ; v1(9.35,8.35) 9.35,8.219 9.369,8.2 10.575,8.2 U1.107 ; v1@9.369,8.191 9.179,8.191 8.954,7.965 8.934,7.965 7.818,6.85 7.023,6.055 ; U1.94 10.6,1.725 7.5,1.725 ; v1(12.563,9.484) 12.637,9.484 13.121,9 14.7,9 15,9.3 15,11.25 14.6,11.65 14.35,11.65 P3.26 ; 7.023,6.055 7.023,3.502 7.5,3.025 7.5,1.725
  Bottom Layer w0.2: P1.11 -15.75,2 -14.75,3 -12.561,3 -12.061,3.5 v1(-12,3.5) ; v1(-12.604,-11.69) -12.604,-11.614 -11.389,-10.4 -3.731,-10.4 -3.25,-9.919 -3.25,-8.316 -3.941,-7.625 -5.005,-7.625 -5.63,-7 -7.29,-7 -7.79,-7.5 -8.5,-7.5 -9.197,-6.803 v1@-9.197,-5.836 ; P4.24 -10,13 v1(-9.5,12.5) ; v1(-9.338,-5.866) -9.261,-5.788 -9.261,-4.861 -7.9,-3.5 -7.9,-0.085 -8.25,0.265 v1(-8.25,0.378) ; v1(-6.4,12.3) -6.266,12.166 -5.965,12.166 -5.933,12.134 -4.134,12.134 v1(-4,12) ; v1(0.175,2) 0.129,2.046 0.129,3.672 0.011,3.789 0.072,3.85 ; R1.1 R3.1 -1.275,-3.15 -1.575,-2.85 -1.575,-1.964 -2.5,-1.039 -2.5,3.683 -2.383,3.8 -1.55,3.8 C2.1 0.072,3.85 ; v1(3.3,-6.6) 3.3,-6.789 3.523,-7.012 3.523,-8.942 v1(3.389,-9.075) ; v1(3.941,11.949) 4.038,11.949 5.189,13.1 7.35,13.1 8,13.75 P4.6 ; v1(4.697,2.797) 3.643,3.85 C1.1 0.072,3.85 ; v1(5.483,-6.062) 5.5,-6.079 5.5,-7.194 5.906,-7.6 7.176,-7.6 8.771,-9.194 8.771,-11.252 9.219,-11.7 9.827,-11.7 10.9,-10.627 v1(10.9,-10.6) ; v1(6.6,1) 6.6,-1.4 8.466,-3.266 8.915,-3.266 v1(9.021,-3.371) ; v1@9.021,-3.45 11.05,-3.45 12.5,-2 P3.12 ; v1(9.35,8.35) 11.411,8.35 12.545,9.484 v1(12.563,9.484)
LCD-DI: P1.6 U1.5 | length 3.9
  Top Layer w0.2: P1.6 -13.717,7.717 -13.117,7.717 -12.15,6.75 U1.5
LCD-RW: P1.5 U1.4 | length 6.6
  Top Layer w0.2: P1.5 -15.75,8 -14.75,9 -13.3,9 -12.8,8.5 -12.8,8.286 -11.764,7.25 U1.4
LED-BLUE: P1.23 U1.18 | length 17.3
  Top Layer w0.2: v1(-12.55,-5.3) -12.5,-5.25 -12.5,-4.55 -12.4,-4.45 -12.4,-0.35 -11.8,0.25 U1.18
  Bottom Layer w0.2: P1.23 -15.75,-10 -14.75,-11 -13.261,-11 -11.639,-9.379 -11.2,-8.939 -11.2,-6.65 -11.39,-6.46 -11.39,-6.451 -11.841,-6 -11.85,-6 v1(-12.55,-5.3)
LED-GREEN: P1.24 U1.19 | length 11.9
  Top Layer w0.2: v1(-12.14,-6.761) -12.14,-6.634 -11.8,-6.294 -11.8,-0.5 -11.6,-0.3 -10.675,-0.3 U1.19
  Bottom Layer w0.2: P1.24 -13.65,-9.65 -13.35,-9.65 -12.14,-8.44 v1(-12.14,-6.761)
LED-RED: P1.25 U1.46 | length 21.6
  Top Layer w0.2: U1.46 -4.2,-10.575 -4.2,-9.826 -2.174,-7.8 v1(-2.03,-7.8)
  Bottom Layer w0.2: P1.25 -15.75,-12 -14.75,-13 -11.816,-13 -10.016,-11.2 -3.4,-11.2 -2.03,-9.83 v1(-2.03,-7.8)
LED-YELLOW: P2.2 U1.47 | length 10.5
  Top Layer w0.2: U1.47@-3.732,-11.057 -3.726,-11.063 -3.726,-11.926 v1(-3.702,-11.95)
  Bottom Layer w0.2: P2.2 -12,-13.75 -9.85,-11.6 -4.169,-11.6 -3.819,-11.95 v1(-3.702,-11.95)
LM35-OUT: P4.8 U1.21 | length 30.2
  Top Layer w0.2: U1.21 -7.603,-1.25 -6.953,-0.6 -2.1,-0.6 -1.117,0.383 0.417,0.383 2,1.966 2,3.3 0.18,5.12 0.18,5.191 -0.02,5.391 v1(-0.02,5.58)
  Bottom Layer w0.2: v1(-0.02,5.58) -0.02,5.654 1.996,7.67 1.996,11.396 3.35,12.75 4.274,12.75 5.024,13.5 5.2,13.5 5.65,13.5 6,13.85 P4.8
MISO: P1.22 U1.42 | length 15.6
  Top Layer w0.2: P1.22 -13.942,-8 -13.592,-8.35 -13.592,-8.633 -11.5,-10.725 -10.225,-10.725 -8.7,-9.2 -8.7,-8.3 -8.225,-7.825 -7.549,-7.825 -6.757,-7.033 -5.567,-7.033 -5.1,-7.5 -5.1,-8.039 -5.528,-8.466 -5.528,-8.762 -6.1,-9.334 -6.1,-9.726 -6.2,-9.826 -6.2,-9.832 -6.2,-10.09 U1.42@-6.3,-10.19
MMC-NSS: P1.19 U1.40 | length 12.5
  Top Layer w0.2: P1.19 -15.75,-6 -14.9,-6.85 -13.11,-6.85 -12.7,-7.26 -12.7,-7.271 -12.1,-7.871 -12.1,-8.8 -11.45,-9.45 -10.825,-9.45 v1(-10.701,-9.574) ; v1(-7.28,-9.285) -7.265,-9.3 -7.265,-10.61 U1.40
  Bottom Layer w0.2: v1(-10.701,-9.574) -10.559,-9.574 -10.233,-9.9 -7.867,-9.9 -7.28,-9.313 v1(-7.28,-9.285)
MOSI: P1.21 U1.43 | length 19.6
  Top Layer w0.2: P1.21 -15.75,-8 -15,-7.25 -13.276,-7.25 -13.1,-7.426 -13.1,-7.437 -12.5,-8.037 -12.5,-9.159 -11.334,-10.325 -10.391,-10.325 -9.1,-9.034 -9.1,-8.115 -8.409,-7.425 -7.715,-7.425 -6.923,-6.633 -5.402,-6.633 -4.7,-7.334 -4.7,-8.204 -5.128,-8.632 -5.128,-8.928 -5.7,-9.5 -5.7,-10.575 U1.43
PB1+ETH_INT: P1.7 U1.10 | length 6.1
  Top Layer w0.2: P1.7 -15.75,6 -14.75,5 -12.5,5 -11.75,4.25 U1.10
PB2: P1.8 U1.132 | length 13.6
  Top Layer w0.2: v1(-6.033,8.533) -5.933,8.533 -5.565,8.9 -3.726,8.9 -2.8,9.826 -2.8,10.575 U1.132
  Bottom Layer w0.2: P1.8 -11.561,6 -9.111,8.45 -7.85,8.45 -7.717,8.583 -6.083,8.583 v1(-6.033,8.533)
PB3: P1.14 U1.12 | length 9.8
  Top Layer w0.2: U1.12 -9.711,3.25 -9.017,3.944 -8.408,3.944 v1(-8.402,3.95)
  Bottom Layer w0.2: P1.14 -13,0 -9.012,3.988 -8.439,3.988 v1(-8.402,3.95)
PB4: P1.15 U1.13 | length 11
  Top Layer w0.2: U1.13 -9.322,2.75 -9.096,2.976 v1(-8.913,2.976)
  Bottom Layer w0.2: P1.15 -15.75,-2 -14.75,-1 -13.2,-1 -9.358,2.842 -9.047,2.842 v1(-8.913,2.976)
PIN1: P1.1 U1.140 | length 13.5
  Top Layer w0.2: P1.1 -15.75,12 -14.75,13 -12.8,13 -9.5,9.7 -9.5,8.914 -9.036,8.45 -7.95,8.45 -6.75,9.65 U1.140
PIN10: P1.10 P2.6 P3.11 P4.5 R2.2 R4.2 U1.6 U1.17 U1.39 U1.52 U1.62 U1.72 U1.84 U1.95 U1.108 U1.121 U1.131 U1.144 | length 158.3
  Top Layer w0.2: P1.10 -13.75,4 -12.5,2.75 -12.5,1.5 -11.75,0.75 U1.17 -9.745,0.75 -8.595,-0.4 -7.884,-0.4 -7.034,0.45 -6.384,0.45 v1(-6.284,0.55) ; U1.6 -10.575,6.3 -9.826,6.3 -9.636,6.49 -9.636,6.864 v1(-8.8,7.7) ; U1.144 -8.737,10.612 -8.737,9.212 v1(-8.725,9.2) ; P2.6 -8,-13.75 -8.441,-13.309 -8.441,-12.407 -7.75,-11.716 U1.39 -7.8,-10.575 -7.8,-9.826 -8.25,-9.376 -8.25,-8.589 -7.904,-8.243 v1(-6.907,-8.243) ; v1(-6.832,7.733) -5.742,7.733 -4.975,8.5 -3.5,8.5 -2.25,9.75 U1.131 ; v1(-6.307,-1.75) -6.19,-1.75 -5.84,-1.4 -2.113,-1.4 -1.463,-2.05 2.376,-2.05 3.926,-0.5 v1(5.5,-0.5) 3.95,-2.05 v1(3.95,-5.7) ; v1(-4.378,-8.943) -4.378,-8.878 -2.55,-7.05 0.911,-7.05 1.509,-6.452 1.509,-6.034 v1(1.641,-5.902) ; U1.52 -1.25,-9.35 -0.2,-8.3 2.15,-8.3 2.588,-7.862 2.958,-7.862 3.396,-8.3 4.139,-8.3 ; U1.62 3.8,-10.575 3.8,-9.725 4.139,-9.386 4.139,-8.3 ; v1(6.25,-6.85) 6.25,-7 4.95,-8.3 4.139,-8.3 ; v1(6.607,2.332) 6.607,4.982 5.05,6.539 5.05,6.77 3.196,8.624 3.196,9.119 2.75,9.565 U1.121 2.75,11.819 3.631,12.7 4.29,12.7 4.75,12.24 4.75,12.039 5.189,11.6 5.811,11.6 7,12.789 7,14.75 8,15.75 P4.5 ; U1.72 8.75,-10.891 8.8,-10.941 v1(9.521,-10.941) ; v1(9.249,3.95) 9.249,2.367 9.366,2.25 U1.95 10.65,2.225 11.575,2.225 12.5,1.3 12.5,-0.4 12.983,-0.883 14.633,-0.883 P3.11@15.75,-2 ; U1.84 12.65,-3.25 12.9,-3 14.75,-3 P3.11@15.75,-2 ; U1.108 11.633,8.75 12,8.383 12,7.375 12.6,6.775 12.6,5.552 v1(12.537,5.49) ; P3.11 P3.11@15.75,-2
  Bottom Layer w0.2: v1(-8.8,7.7) -8.767,7.733 v1(-6.832,7.733) ; v1(-8.725,9.2) -8.591,9.334 -8.299,9.334 -8.233,9.4 -5.475,9.4 -5.283,9.208 -5.283,8.222 -5.771,7.733 v1(-6.832,7.733) ; v1(-6.907,-8.243) -6.757,-8.243 -6.057,-8.943 v1(-4.378,-8.943) ; v1(-6.307,-1.75) -6.295,-1.739 -6.295,0.539 v1(-6.284,0.55) ; v1@-6.29,0.556 -6.295,0.561 -6.295,1.255 -6.15,1.4 -6.15,7.052 v1(-6.832,7.733) ; R4.2 -2.7,-5.15 -2.367,-5.15 -1.968,-5.549 -1.8,-5.549 -1.799,-5.55 1.05,-5.55 v1@1.266,-5.766 ; v1@2.034,-5.766 2.425,-5.375 2.425,-5.15 2.725,-4.85 3.275,-4.85 v1@3.809,-5.384 ; v1(2.773,-7.862) 2.773,-7.673 2.55,-7.45 2.55,-6.289 3.139,-5.7 v1(3.95,-5.7) ; v1@5.3,-0.111 5.3,1 6.366,2.066 6.366,2.106 v1@6.607,2.347 ; v1(6.25,-6.85) 6.349,-6.948 7,-6.948 7.252,-7.2 7.433,-7.2 9.6,-9.367 9.6,-10.862 v1(9.521,-10.941) ; v1(6.607,2.332) 6.607,2.4 7.312,3.105 7.312,3.123 7.789,3.6 8.709,3.6 9.059,3.95 v1(9.249,3.95) 10.789,5.49 v1(12.537,5.49)
PIN12: P1.12 U1.37 | length 39.6
  Top Layer w0.2: v1(-11.414,-11.486) -11.308,-11.486 -10.947,-11.125 -8.825,-11.125 -8.75,-11.05 U1.37
  Bottom Layer w0.2: P1.12 -12.2,2 -9.1,5.1 -7.7,5.1 -6.6,4 -6.6,2.39 -7.1,1.89 -7.1,-4 -7.666,-4.566 -7.666,-5.974 -7.136,-6.503 -5.561,-6.503 -4.864,-7.2 -3.8,-7.2 -2.85,-8.15 -2.85,-10.084 -3.566,-10.8 -10.729,-10.8 v1(-11.414,-11.486)
PIN13: P1.13 U1.36 | length 26.1
  Top Layer w0.2: U1.36 -10.608,-8.767 -9.767,-8.767 -9.5,-8.5 -9.5,-7.949 -8.601,-7.05 -8.59,-7.05 -8.215,-6.675 v1(-8.025,-6.675)
  Bottom Layer w0.2: P1.13 -15.75,0 -14.75,1 -12.628,1 -8.928,4.7 -7.866,4.7 -7,3.834 -7,2.569 -7.5,2.069 -7.5,-3.834 -8.066,-4.4 -8.066,-6.634 v1(-8.025,-6.675)
PIN16: P1.16
PIN17: P1.17 U1.14 | length 15.2
  Top Layer w0.2: U1.14 -9.247,2.25 -9.223,2.226 -8.403,2.226 -7.8,2.829 v1(-7.8,3)
  Bottom Layer w0.2: P1.17 -15.75,-4 -14.75,-3 -13.3,-3 -12.655,-2.355 -12.655,-1.055 -9.379,2.221 -8.411,2.221 -7.8,2.832 v1(-7.8,3)
PIN20: P1.20 U1.41 | length 14.2
  Top Layer w0.2: U1.41 -6.7,-10.575 -6.7,-9.766 -6.53,-9.596 -6.53,-9.198 -5.928,-8.596 -5.928,-7.802 v1(-5.908,-7.783)
  Bottom Layer w0.2: P1.20 -13.95,-6 -13.6,-5.65 -13.6,-5.289 -12.811,-4.5 -11.5,-4.5 -10.565,-5.435 -10.565,-6.035 -8.7,-7.9 -7.625,-7.9 -7.218,-7.493 -6.387,-7.493 -6.097,-7.783 v1(-5.908,-7.783)
PIN30: P2.5 U1.25 | length 25.2
  Top Layer w0.2: U1.25 -8.981,-3.25 -8.931,-3.3 -4,-3.3 -1.65,-5.65 -1.65,-6.257 v1(-1.693,-6.3)
  Bottom Layer w0.2: P2.5 -8,-15.75 -7,-14.75 -7,-13.217 -6.883,-13.1 -6.121,-13.1 -5.14,-13.1 -4.74,-12.7 -4.6,-12.7 -3.306,-12.7 -2.906,-12.3 -2.9,-12.3 -1.2,-10.6 -1.2,-6.99 -1.365,-6.825 -1.365,-6.818 -1.693,-6.489 v1(-1.693,-6.3)
PIN33: P2.8 U1.24 | length 23.2
  Top Layer w0.2: U1.24 -8.916,-2.75 -8.766,-2.9 -3.6,-2.9 -0.727,-5.773 -0.727,-6.166 v1(-0.593,-6.3)
  Bottom Layer w0.2: P2.8 -6,-13.85 -5.65,-13.5 -4.974,-13.5 -4.574,-13.1 -3.14,-13.1 -2.74,-12.7 -2.734,-12.7 -0.3,-10.266 -0.3,-6.767 -0.593,-6.474 v1(-0.593,-6.3)
PIN34: P2.9 U1.23 | length 24.5
  Top Layer w0.2: U1.23 -8.85,-2.25 -8.6,-2.5 -3.23,-2.5 -2.83,-2.9 -2.8,-2.9 v1(0.6,-6.3)
  Bottom Layer w0.2: P2.9 -4,-15.75 -3,-14.75 -3,-13.526 -2.574,-13.1 -2.569,-13.1 0.6,-9.931 v1(0.6,-6.3)
PIN43: P2.18 U1.69 | length 7.3
  Top Layer w0.2: U1.69 7.283,-10.592 7.283,-9.398 v1(7.316,-9.366)
  Bottom Layer w0.2: P2.18 4,-12.734 7.316,-9.418 v1(7.316,-9.366)
PIN44: P2.19 U1.70 | length 12
  Top Layer w0.2: U1.70 7.8,-10.675 7.8,-11.7 7.9,-11.8 10.466,-11.8 10.513,-11.847 10.521,-11.847 10.699,-12.025 v1(10.889,-12.025)
  Bottom Layer w0.2: P2.19 6,-15.75 7,-14.75 7,-13 7.9,-12.1 10.814,-12.1 v1(10.889,-12.025)
PIN45: P2.20 U1.102 | length 27.3
  Top Layer w0.2: v1(8.642,5.45) 8.66,5.432 9.492,5.432 9.791,5.731 10.606,5.731 U1.102
  Bottom Layer w0.2: P2.20 6,-12.345 8.1,-10.245 8.1,-9.089 7.011,-8 5.624,-8 5.1,-7.476 5.1,-6.739 4.7,-6.339 4.7,-5.251 4.34,-4.891 4.34,1.38 5.447,2.486 5.447,2.884 6.045,3.482 6.54,3.482 7.004,3.946 7.004,4.278 7.004,4.507 7.597,5.1 8.175,5.1 8.525,5.45 v1(8.642,5.45)
PIN46: P2.21 U1.101 | length 31.4
  Top Layer w0.2: v1(7.908,4.35) 8.025,4.35 8.375,4.7 9.326,4.7 9.826,5.2 10.575,5.2 U1.101
  Bottom Layer w0.2: v1(7.908,4.35) 7.908,4.284 6.706,3.082 6.21,3.082 5.857,2.729 5.857,2.299 4.74,1.182 4.74,-4.536 5.516,-5.312 5.929,-5.312 7.264,-6.647 7.445,-6.647 10.498,-9.7 11.3,-9.7 11.7,-10.1 11.7,-12.298 11.223,-12.775 9.225,-12.775 9,-13 9,-14.75 8,-15.75 P2.21
PIN49: P2.24 U1.65 | length 7.6
  Top Layer w0.2: U1.65 5.25,-12.083 5.767,-12.6 9.538,-12.6 10,-13.062 P2.24
PIN50: P2.25 U1.66 | length 10.3
  Top Layer w0.2: U1.66 5.75,-11.95 6,-12.2 10,-12.2 11.102,-13.302 11.102,-14.852 12,-15.75 P2.25
PIN51: P3.1 U1.67 | length 13.5
  Top Layer w0.2: U1.67 6.2,-10.575 6.2,-9.826 6.166,-9.791 6.166,-8.834 6.8,-8.2 8.766,-8.2 9.966,-9.4 11.326,-9.4 12.926,-11 14.75,-11 15.75,-12 P3.1
PIN52: P3.2 U1.68 | length 10.7
  Top Layer w0.2: U1.68 6.708,-10.583 6.708,-9.818 6.6,-9.711 6.6,-9.694 6.566,-9.66 6.566,-9.055 7.005,-8.616 8.616,-8.616 9.8,-9.8 11.161,-9.8 13.217,-11.857 13.857,-11.857 P3.2
PIN53: P3.3 U1.86 | length 19
  Top Layer w0.2: v1(5.95,-4.119) 5.852,-4.021 5.852,-2.748 6.45,-2.15 9.426,-2.15 9.526,-2.25 U1.86
  Bottom Layer w0.2: v1(5.95,-4.119) 5.95,-4.201 7.461,-5.712 7.641,-5.712 10.83,-8.9 14.65,-8.9 15.75,-10 P3.3
PIN54: P3.4 U1.85 | length 17.9
  Top Layer w0.2: v1(6.681,-2.979) 6.79,-2.979 7.149,-2.621 9.331,-2.621 9.46,-2.75 U1.85
  Bottom Layer w0.2: v1(6.681,-2.979) 5.621,-2.979 5.2,-3.4 5.2,-4.43 5.682,-4.912 6.095,-4.912 7.295,-6.112 7.476,-6.112 10.664,-9.3 13.15,-9.3 13.85,-10 P3.4
PIN55: P3.5 U1.82 | length 7.7
  Top Layer w0.2: U1.82 11.55,-4.25 12.6,-5.3 12.6,-6.6 13,-7 14.75,-7 15.75,-8 P3.5
PIN56: P3.6 U1.81 | length 5.6
  Top Layer w0.2: U1.81 10.65,-4.775 11.424,-4.775 12.137,-5.488 12.137,-7.032 12.945,-7.839 12.945,-7.845 13.1,-8 P3.6
PIN57: P3.7 U1.80 | length 9.5
  Top Layer w0.2: v1(8.844,-5.273) 8.856,-5.261 10.614,-5.261 U1.80
  Bottom Layer w0.2: v1(8.844,-5.273) 8.96,-5.273 9.311,-4.921 14.671,-4.921 15.75,-6 P3.7
PIN58: P3.8 U1.79 | length 6.5
  Top Layer w0.2: U1.79 10.675,-5.8 11.424,-5.8 11.737,-6.113 11.737,-7.652 12.195,-8.109 v1(12.195,-8.15)
  Bottom Layer w0.2: v1(12.195,-8.15) 12.329,-8.016 12.329,-7.671 13.5,-6.5 13.5,-6.35 13.85,-6 P3.8
PIN59: P3.9 U1.78 | length 15
  Top Layer w0.2: v1(9.275,-6.285) 9.292,-6.267 10.608,-6.267 U1.78
  Bottom Layer w0.2: v1(9.275,-6.285) 9.141,-6.151 8.646,-6.151 7.807,-5.311 7.626,-5.311 7.1,-4.785 7.1,-4.085 7.524,-3.661 8.25,-3.661 8.71,-4.121 11.879,-4.121 13,-3 14.75,-3 15.75,-4 P3.9
PIN60: P3.10 U1.77 | length 11
  Top Layer w0.2: v1(7.937,-4.561) 7.9,-4.598 7.9,-5.97 8.964,-7.035 9.586,-7.035 9.823,-6.797 10.578,-6.797 U1.77
  Bottom Layer w0.2: v1(7.937,-4.561) 7.977,-4.521 12.47,-4.521 12.991,-4 P3.10
PIN63: P3.13
PIN64: P3.14
PIN65: P3.15
pin68: P3.18 U1.105 | length 5.8
  Top Layer w0.2: U1.105 11.55,7.25 11.75,7.05 11.75,5.216 12.966,4 P3.18
pin69: P3.19 U1.109 | length 12.9
  Top Layer w0.2: U1.109 8.75,10.45 8.8,10.4 v1(9.7,10.4) ; v1(12.842,10.984) 12.842,10.91 11.813,9.882 11.813,9.155 12.5,8.468 12.5,7.5 13,7 14.75,7 15.75,6 P3.19
  Bottom Layer w0.2: v1(9.7,10.4) 11.126,10.4 11.741,11.015 12.811,11.015 v1(12.842,10.984)
PIN85: P4.10 U1.126 | length 5.9
  Top Layer w0.2: U1.126 0.275,10.65 0.275,11.424 1.351,12.5 2.3,12.5 3.1,13.3 3.1,13.883 3.217,14 P4.10
PIN86: P4.11 U1.128 | length 6.5
  Top Layer w0.2: U1.128 -0.75,11.666 1,13.416 1,14.75 2,15.75 P4.11
PIN87: P4.12 U1.127 | length 4.3
  Top Layer w0.2: U1.127 -0.25,11.5 2,13.75 P4.12
PIN88: P4.13 U1.129 | length 5.9
  Top Layer w0.2: U1.129 -1.25,12.45 -1,12.7 -1,14.75 0,15.75 P4.13
PIN90: P4.15 U1.137 | length 7.8
  Top Layer w0.2: U1.137 -5.3,10.675 -5.3,12.6 -5,12.9 -5,14.574 -4.574,15 -2.75,15 -2,15.75 P4.15
PIN91: P4.16 U1.136 | length 5.3
  Top Layer w0.2: U1.136 -4.75,12.35 -4.35,12.75 -3,12.75 -2,13.75 P4.16
PIN94: P4.19 U1.26 | length 33.9
  Top Layer w0.2: U1.26 -10.575,-3.7 -9.796,-3.7 -4.7,-3.7 -2.939,-5.461 -2.939,-5.489 -2.718,-5.711 v1(-2.718,-5.9)
  Bottom Layer w0.2: P4.19 -6,15.75 -5,14.75 -5,13 -4.75,12.75 -3.689,12.75 -3.238,12.299 -3.238,7.062 -3.607,6.693 -3.607,-2.257 -3.975,-2.626 -3.975,-5.199 -3.975,-5.374 -3.649,-5.7 -3.108,-5.7 -2.908,-5.9 v1(-2.718,-5.9)
PIN95: P4.20 U1.27 | length 31.9
  Top Layer w0.2: U1.27 -8.65,-4.25 -8.5,-4.1 -5.2,-4.1 -3.935,-5.365 -3.935,-6.332 v1(-3.977,-6.375)
  Bottom Layer w0.2: P4.20 -6,13.75 -6.7,13.05 -6.711,13.05 -7.15,12.611 -7.15,11.989 -6.419,11.258 -4.958,11.258 -3.638,9.938 -3.638,7.228 -4.007,6.859 -4.007,-2.092 -4.375,-2.46 -4.375,-5.54 -4.111,-5.804 -4.111,-5.809 -4.069,-5.852 -4.069,-6.283 v1(-3.977,-6.375)
PIN96: P4.21 U1.28 | length 31.9
  Top Layer w0.2: U1.28 -10.591,-4.716 -8.416,-4.716 -8.2,-4.5 -5.566,-4.5 -4.994,-5.072 -4.994,-5.96 v1(-4.997,-5.963)
  Bottom Layer w0.2: P4.21 -8,15.75 -7.25,15 -7.25,13.176 -7.55,12.876 -7.55,11.824 -6.584,10.858 -5.205,10.858 -4.038,9.692 -4.038,7.559 -4.407,7.191 -4.407,-1.926 -4.775,-2.294 -4.775,-4.963 -4.994,-5.182 -4.994,-5.96 v1(-4.997,-5.963)
PIN97: P4.22 U1.29 | length 27.3
  Top Layer w0.2: U1.29 -10.575,-5.2 -9.733,-5.2 -9.649,-5.116 -7.789,-5.116 -7.586,-4.913 -6.451,-4.913 -6.064,-5.3 v1(-5.875,-5.3)
  Bottom Layer w0.2: P4.22 -8,11.708 -6.75,10.458 -5.37,10.458 -4.438,9.526 -4.438,7.725 -4.925,7.238 -4.925,-1.879 -5.175,-2.129 -5.175,-4.797 -5.316,-4.939 -5.324,-4.939 -5.685,-5.3 v1(-5.875,-5.3)
PIN98: P4.23
PIN100: P4.25 U1.33 | length 31.7
  Top Layer w0.2: U1.33 -10.575,-7.2 -9.933,-7.2 -9.612,-7.2 -8.079,-5.667 -6.92,-5.667 v1(-6.916,-5.663)
  Bottom Layer w0.2: P4.25 -12,15.75 -11.65,15.4 -11.564,15.4 -11,14.836 -11,12.5 -8.558,10.058 -5.536,10.058 -4.838,9.36 -4.838,8.101 -5.325,7.614 -5.325,-1.713 -5.575,-1.963 -5.575,-3.375 -6.916,-4.716 v1(-6.916,-5.663)
RTC_OSCI: C1.2 U1.8 Y1.1 | length 24
  Top Layer w0.2: U1.8 -9.45,5.25 -8.9,5.8 -8.444,5.8 -7.661,6.583 -5.76,6.583 -4.643,7.7 -0.353,7.7 1.13,6.216 1.13,5.47 1.885,4.715 2.8,3.8 2.8,1.334 2.799,1.333 2.799,0.201 v1(2.9,0.1)
  Bottom Layer w0.2: Y1.1 Y1.1@1.35,0.1 ; C1.2@1.5,1.889 1.8,1.589 1.8,1.4 1.7,1.3 1.7,0.45 Y1.1@1.35,0.1 ; v1(2.9,0.1) Y1.1@1.35,0.1
RTC_OSCO: C2.2 U1.9 Y1.2 | length 27.7
  Top Layer w0.2: U1.9 -9.384,4.75 -8.734,5.4 -8.278,5.4 -7.495,6.183 -5.594,6.183 -4.478,7.3 -0.519,7.3 -0.047,6.828 0.73,6.051 0.73,5.304 2.4,3.635 2.4,1.8 v2(-0.3,-0.9)
  Bottom Layer w0.2: Y1.2 -1.561,0.311 -1.561,1.25 -1.667,1.356 ; v2(-0.3,-0.9) -0.35,-0.85 -0.8,-0.85 -1.225,-0.425 -1.225,0.025 -1.667,0.467 -1.667,1.356 ; -1.667,1.356 -1.817,1.506 -1.817,1.85 -1.667,2 -1.667,1.356
SEV-PWM: U1.34
VGA-B-PWM: U1.96
VGA-G-PWM: U1.97
VGA-R-PWM: U1.98
pads on no net: U1.31 U1.32 U1.58 U1.59 U1.60 U1.73 U1.74 U1.75 U1.76 U1.88 U1.89 U1.90 U1.91 U1.92 U1.93 U1.103 U1.104 U1.106 U1.110 U1.112 U1.133 U1.134 U1.135 U1.139 U1.141 U1.142
copper on no net: | length 1.3
  Top Layer w0.4: -10.4,9.7 ccw(c-10.6,9.7) -10.4,9.7

## Keep-outs
Keep-Out Layer:
  lines w0.3: -17.5,-17.5 -17.5,12.8 -12.8,17.5 17.5,17.5 17.5,-17.5 -17.5,-17.5

## Other copper
Top Layer:
  text "Designed By:" at -7.5,4.1 h0.7
  text "M.A.N." at -6.9,1.8 h1.5
Bottom Layer:
  text "STM32" at 12.279,2.2 h1
  text "F103" at 12.329,0.25 h1.5
  text "ZET6" at 12.529,-1.55 h1.5

## Silkscreen, mask and mechanical layers (free items; w line width, h text height)
Top Overlay:
  lines w0.5: -17.4,-17.4 -17.4,12.8 -12.8,17.4 17.4,17.4 17.4,-17.4 -17.4,-17.4
Top Solder:
  circle w0.4: c-10.62,9.48 r0.2
Bottom Solder:
  text "STM32" at 12.3,2.2 h1
  text "F103" at 12.35,0.25 h1.5
  text "ZET6" at 12.55,-1.55 h1.5